# Altium PCB nse5310-module-stm32.PcbDoc
Units mm, origin at the board's own origin, x right, y up, seen from the top; angles counter-clockwise.
Board outline 25 x 25 mm, 2 copper layers (Top Layer, Bottom Layer), stack 1.581 mm thick; 21 components, 18 nets, 106 pads, 0 vias.
Unrouted connection lines stored in the file: 39.
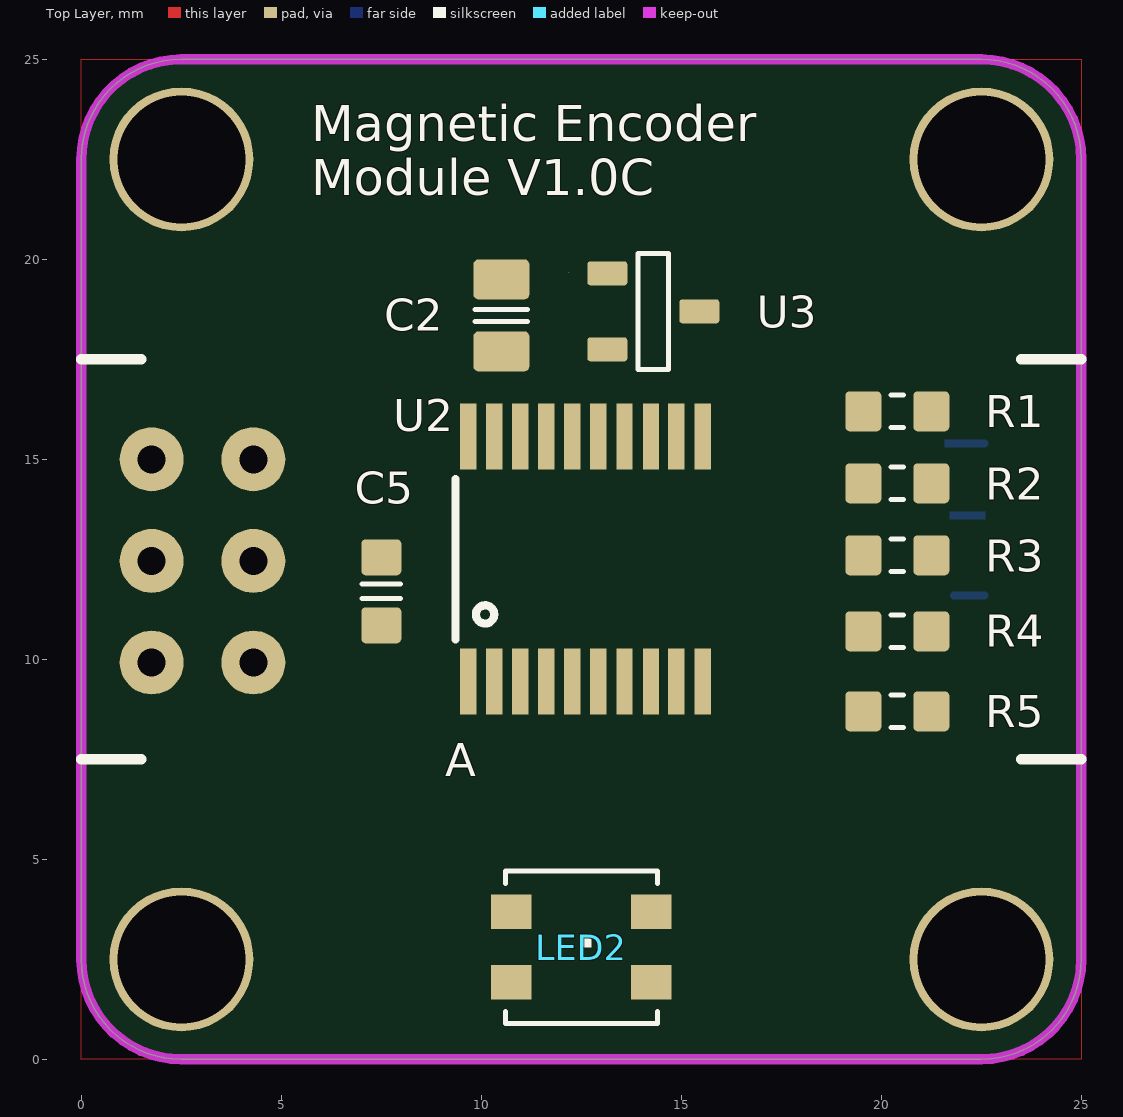
[diagram p0: Top Layer view]
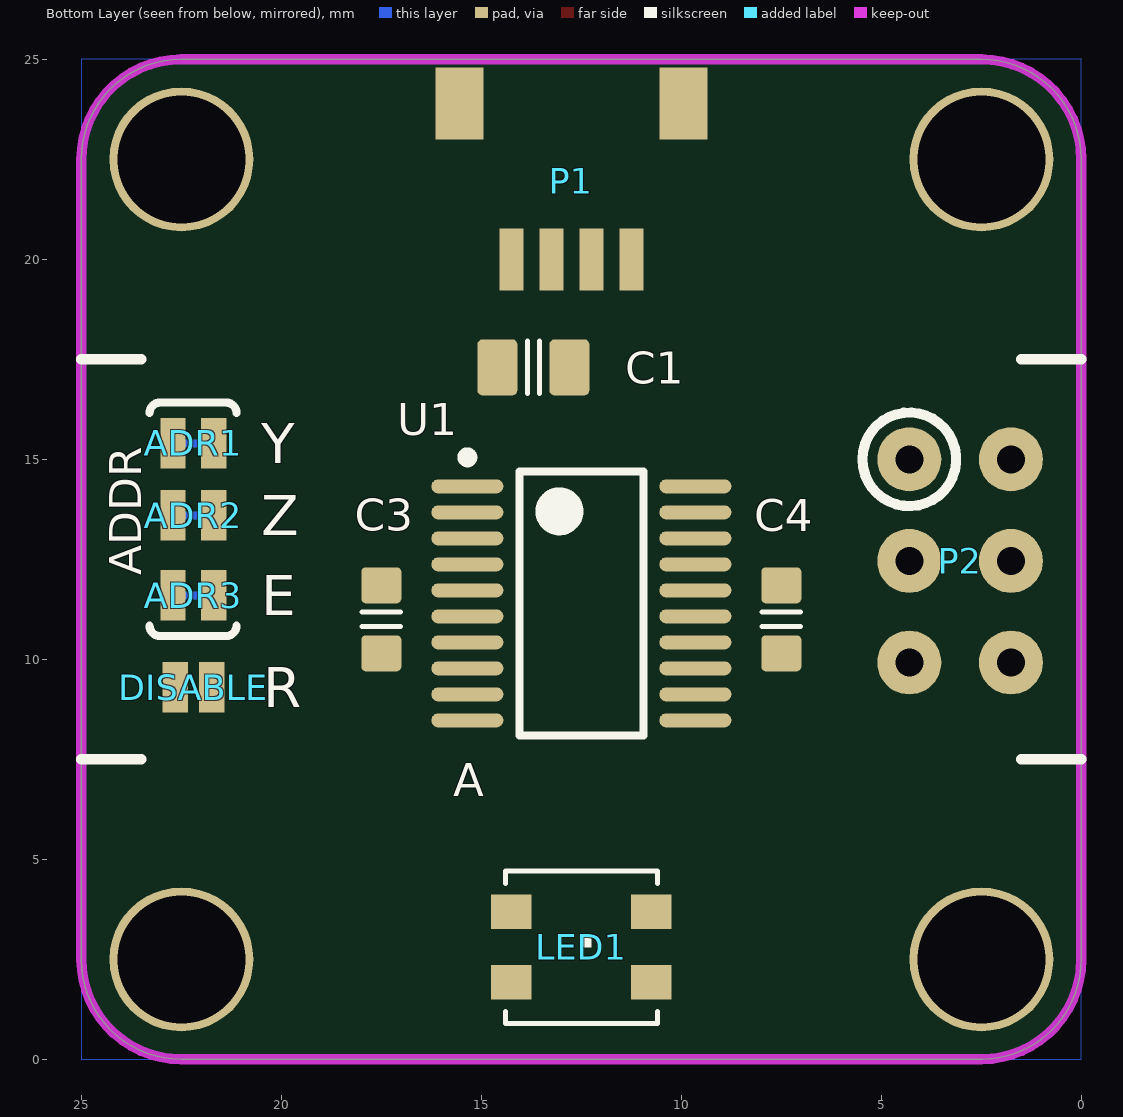
[diagram p1: Bottom Layer view, seen from below]

## Layer stack, top to bottom
Top Solder: solder mask 0.0102, Solder Resist, Dk 3.5
Top Layer: signal copper 0.0356
Dielectric1: dielectric 1.51, FR-4, Dk 4.8
Bottom Layer: signal copper 0.0356
Bottom Solder: solder mask 0.0102, Solder Resist, Dk 3.5

## Board outline
0,2.5 0,22.5 cw(c2.5,22.5) 2.5,25 22.5,25 cw(c22.5,22.5) 25,22.5 25,2.5 cw(c22.5,2.5) 22.5,0 2.5,0 cw(c2.5,2.5)

## Design rules (kind name [scope] priority, off if disabled: settings)
Clearance [All] p1: gap=0.15
FabricationTestPointUsage TestPointUsage [All] p1: valid=0 allowmultiple=FALSE
FabricationTestpoint Testpoint [All] p1: side=3 testpointundercomponent=TRUE minsize=1.016 maxsize=2.54 preferedsize=1.524 minholesize=0 maxholesize=1.016 preferedholesize=0.813 testpointgrid=0.025 allowsidetop=TRUE allowsidebottom=TRUE usegrid=TRUE gridtolerance=0
HoleSize [All] p1: absolutevalues=TRUE maxlimit=3.5 minlimit=0.025 maxpercent=80.000 minpercent=20.000
PolygonConnect [All] p1: connectstyle=Relief reliefconductorwidth=0.254 reliefentries=4 polygonreliefangle="90 Angle" airgapwidth=0.254
RoutingVias [All] p1: holewidth=0.25 width=0.5 viastyle="Through Hole" minholewidth=0.25 minwidth=0.5 maxholewidth=1 maxwidth=1.4
SilkToSolderMaskClearance SilkscreenOverComponentPads [IsPad] p1: minsilkscreentomaskgap=0.254 clearancetoexposedcopper=TRUE
SolderMaskExpansion [All] p1: expansion=0.102
Width [All] p1: maxlimit=1 minlimit=0.2 preferedwidth=0.25
26 further rules are at their usual default settings.

## Components (designator, comment, footprint, x,y, rotation, side; value= is the part's Value field where it differs from the comment)
ADR1 "JUMPER-PAD-2-NC_BY_TRACE" PAD-JUMPER-2-NC_BY_TRACE_YES_SILK#1 22.2,15.4 r0 bottom
ADR2 "JUMPER-PAD-2-NC_BY_TRACE" PAD-JUMPER-2-NC_BY_TRACE_YES_SILK#2 22.2,13.6 r0 bottom
ADR3 "JUMPER-PAD-2-NC_BY_TRACE" PAD-JUMPER-2-NC_BY_TRACE_YES_SILK#1 22.2,11.6 r0 bottom
C1 "approved sub OK" CAPC2012X135N 13.7,17.3 r180 bottom
C2 "approved sub OK" CAPC2012X135N 10.5,18.6 r270 top
C3 "approved sub OK" CAPC1608X90N 17.5,11 r270 bottom
C4 "approved sub OK" CAPC1608X90N 7.5,11 r270 bottom
C5 "approved sub OK" CAPC1608X90N 7.5,11.7 r270 top
DISABLE "JUMPER-PAD-2-NO" PAD-JUMPER-2-NO_NO_SILK 22.2,9.3 r180 bottom
LED1 "WS2812B3535" LED3535 12.5,2.8 r180 bottom
LED2 "WS2812B3535" LED3535 12.5,2.8 r0 top
P1 "JST-SH 4P" SM04B-SRSS-TB 14.25,20 r90 bottom
P2 "ISP" "ICSP Pads - SMD" 4.3,15 r180 bottom
R1 "Thick Film" RESC1608X55N 20.4,16.2 r0 top
R2 "Thick Film" RESC1608X55N 20.4,14.4 r0 top
R3 "Thick Film" RESC1608X55N 20.4,12.6 r180 top
R4 "Thick Film" RESC1608X55N 20.4,10.7 r180 top
R5 "Thick Film" RESC1608X55N 20.4,8.7 r180 top
U1 "STM32F030F4P6" STM-TSSOP20_N 12.5,11.4 r180 bottom
U2 "NSE-5310" NSE-5310 13.25,12.5 r0 top
U3 "AP7313-33SR" SOT23-3 14.3,18.7 r0 top

## Footprints (in the part's own frame and the unit in brackets; to place one, negate y for a bottom-side part, rotate by r counter-clockwise, add the part's x,y. Pads: shape width x height; smd on the part's side, far side on the other; paste and mask are expansions set on the pad)
CAPC1608X90N [mm] "Chip Capacitor, Body 1.6x0.8mm, EIA 0603, IPC Medium Density"
  round 0.254 on Mech15: 0(0,0)
  rrect25% 0.9x1 smd: 1(-0.85,0) 2(0.85,0)
  Top Layer pour cut-out: -0.6,0.5 -0.4,0.7 0.4,0.7 0.6,0.5 0.6,-0.5 0.4,-0.7 -0.4,-0.7 -0.6,-0.5
  silkscreen extent -0.18,-0.48 0.18,0.48, body extent -0.85,-0.45 0.85,0.45, height 0.89
CAPC2012X135N [mm] "Chip Capacitor, Body 2.0x1.2mm, EIA 0805, IPC Medium Density"
  round 0.254 on Mech15: 0(0,0)
  rrect25% 1x1.4 smd: 1(-0.9,0) 2(0.9,0)
  Top Layer pour cut-out: -0.675,0.7 -0.475,0.9 0.475,0.9 0.675,0.7 0.675,-0.7 0.475,-0.9 -0.475,-0.9 -0.675,-0.7
  silkscreen extent -0.15,-0.65 0.15,0.65, body extent -1.1,-0.72 1.1,0.73, height 1.34
"ICSP Pads - SMD" [mm]
  round 1.6 hole 0.7: 0(0,0) 1(2.54,0) 2(0,-2.54) 3(2.54,-2.54) 4(0,-5.08) 5(2.54,-5.08)
  silkscreen extent -1.17,-1.17 1.17,1.17
LED3535 [mil]
  rect 40x34 smd: 1(-68.9,35) 2(-68.9,-34.45) 3(69,-34.45) 4(69,35)
  silkscreen extent -75,-75 75,75
NSE-5310 [mil]
  rect 16x65 smd: 1(-140.75,-120.08) 2(-115.16,-120.08) 3(-89.57,-120.08) 4(-63.98,-120.08) 5(-38.39,-120.08) 6(-12.8,-120.08) 7(13,-120.08) 8(39,-120.08) 9(64,-120.08) 10(90,-120.08) 11(90,121) 12(64,121) 13(39,121) 14(13,121) 15(-12.8,121) 16(-38.39,121) 17(-63.98,121) 18(-89.57,121) 19(-115.16,121) 20(-140.75,121)
  silkscreen extent -154,-79 -115,79
PAD-JUMPER-2-NC_BY_TRACE_YES_SILK#1 [mil]
  rect 25x50 smd: 1(-20,0) 2(20,0)
  Top Layer lines w8: -15,0 15,0
  silkscreen extent -42,-40 43,-30
PAD-JUMPER-2-NC_BY_TRACE_YES_SILK#2 [mil]
  rect 25x50 smd: 1(-20,0) 2(20,0)
PAD-JUMPER-2-NO_NO_SILK [mm]
  rect 0.635x1.27 smd: 1(-0.45,0) 2(0.457,0)
RESC1608X55N [mm] "Chip Resistor, Body 1.6x0.8mm, EIA 0603, IPC Medium Density"
  round 0.254 on Mech15: 0(0,0)
  rrect25% 0.9x1 smd: 1(-0.85,0) 2(0.85,0)
  Top Layer pour cut-out: -0.6,0.5 -0.4,0.7 0.4,0.7 0.6,0.5 0.6,-0.5 0.4,-0.7 -0.4,-0.7 -0.6,-0.5
  silkscreen extent -0.15,-0.41 0.15,0.41, body extent -0.87,-0.47 0.88,0.48, height 0.54
SM04B-SRSS-TB [mm]
  rect 1.55x0.6 smd: 0(0,0) 1(0,-1) 2(0,-2) 3(0,-3)
  rect 1.8x1.2 smd: ""(3.9,-4.3) ""(3.9,1.3)
  body extent -0.55,-4.5 4.4,1.5, height 2.96
SOT23-3 [mm] "SOT23, 3 pin"
  round 0.5 on Mech15: 0(0,0)
  rrect25% 1x0.6 smd: 1(-1.15,0.95) 2(-1.15,-0.95) 3(1.15,0)
  silkscreen extent -0.38,-1.45 0.38,1.45, body extent -1.4,-1.45 1.4,1.45, height 1.29
STM-TSSOP20_N [mm] "SOP, 20-Leads, Body 6.6x4.5mm, Pitch 0.65mm, IPC Medium Density"
  oval 1.8x0.35 smd: 1(-2.85,2.925) 2(-2.85,2.275) 3(-2.85,1.625) 4(-2.85,0.975) 5(-2.85,0.325) 6(-2.85,-0.325) 7(-2.85,-0.975) 8(-2.85,-1.625) 9(-2.85,-2.275) 10(-2.85,-2.925) 11(2.85,-2.925) 12(2.85,-2.275) 13(2.85,-1.625) 14(2.85,-0.975) 15(2.85,-0.325) 16(2.85,0.325) 17(2.85,0.975) 18(2.85,1.625) 19(2.85,2.275) 20(2.85,2.925)
  silkscreen extent -2.98,-3.3 1.55,3.77, body extent -2.25,-3.3 2.25,3.3, height 1.2

## Part data
C1 C2: library part CAPC_10u_0805_10V, "Capacitor SMD Cer 10uF 10% 10V X5R 0805"
C3 C4 C5: library part CAPC_100n_0603_X7R_50V_10%, "Capacitor SMD Cer 100nF 10% 50V X7R 0603"
P1: library part SM04B-SRSS-TB
P2: library part "ISP Header"
R1 R2: library part RES_10K_0603_5%, "Resistor SMD chip 10k Ohm 0.1W 5% 0603"
R3 R4 R5: library part RES_3K3_0603_5%, "Resistor SMD chip 3.3k Ohm 0.1W 5% 0603"
U1: "ARM Cortex-M0 32-bit MCU, 16 KB Flash, 4 KB Internal RAM, 15 I/Os, 20-pin TSSOP, -40 to 85 degC, Tube"
U3: library part VREG_3V3_AP7313-33SR, "Voltage Regulator 3.3V LDO SOT23R-3 SMD"

## Free pads (board coordinates)
  round 3.6 hole 3.2: 0(2.5,2.5) 0(2.5,22.5) 0(22.5,2.5) 0(22.5,22.5)

## Nets (pads, with @x,y where several pads share a name; then routed paths per layer and width w, separated by ;. In a path a pad name is that pad's centre, name@x,y a point inside that pad or via, vN(x,y) a via of type N, cw(c..) or ccw(c..) an arc to the next point about the centre after c; other vN are vias at no path point)
3V3: C2.1 C3.1 C4.1 C5.1 P2.0 R2.2 R3.1 R4.1 R5.1 U1.5 U1.16 U2.18 U2.19 U3.2
ADR1: ADR1.2 U1.6
ADR2: ADR2.2 U1.7
ADR3: ADR3.2 U1.8
BOOT0: P2.5 R1.1 U1.1
DISABLE: DISABLE.1 U1.9
ENC_SCL: R3.2 U1.10 U2.13
ENC_SDA: R4.2 U1.11 U2.12
ENC_SEL: U1.12 U2.14
GND: ADR1.1 ADR2.1 ADR3.1 C1.2 C2.2 C3.2 C4.2 C5.2 DISABLE.2 LED1.4 LED2.4 P1.1 P2.4 R1.2 U1.15 U2.8 U3.1
HOST_SCL: P1.3 U1.17
HOST_SDA: P1.2 U1.18
NetLED1_3: LED1.3 LED2.1
NRST: P2.3 R2.1 U1.4
SWCLK: P2.2 U1.20
SWDIO: P2.1 U1.19
VCC: C1.1 LED1.2 LED2.2 P1.0 U3.3
WS2812B: LED1.1 R5.2 U1.13
pads on no net: C1.0 C2.0 C3.0 C4.0 C5.0 LED2.3 P1. R1.0 R2.0 R3.0 R4.0 R5.0 U1.2 U1.3 U1.14 U2.1 U2.2 U2.3 U2.4 U2.5 U2.6 U2.7 U2.9 U2.10 U2.11 U2.15 U2.16 U2.17 U2.20 U3.0

## Polygon pours and split planes (outlines as drawn)
GND on Bottom Layer "Bottom Layer-GND" (solid, shelved, pour order 0): 25,25 25,0 0,0 0,25
GND on Top Layer "Top VCC" (solid, shelved, pour order 2): 25,25 25,0 0,0 0,25

## Keep-outs
Keep-Out Layer:
  the board outline again, w0.254

## Other copper
Bottom Layer:
  rectangle: 21.7,13.5 22.608,13.7
  rectangle net GND: 21.584,15.3 22.492,15.5

## Silkscreen, mask and mechanical layers (free items; w line width, h text height)
Top Overlay:
  lines w0.254: 0,7.5 1.5,7.5 ; 0,17.5 1.5,17.5 ; 23.5,7.5 25,7.5 ; 23.5,17.5 25,17.5
  text "Magnetic Encoder / Module V1.0C" at 5.75,21.6 h0.9
  text "A" at 9.1,6.8 h1.4
Bottom Overlay:
  lines w0.254: 0,7.5 1.5,7.5 ; 0,17.5 1.5,17.5 ; 23.5,7.5 25,7.5 ; 23.5,17.5 25,17.5
  text "Y" at 20.508,14.9 h1
  text "Z" at 20.508,13.1 h1
  text "ADDR" at 23.5,12.1 h0.8 r270
  text "E" at 20.508,11.1 h1
  text "R" at 20.45,8.8 h1
  text "A" at 15.7,6.3 h1.4
Bottom Solder:
  rectangle: 21.908,15.2 22.408,15.6
  rectangle: 21.908,13.4 22.408,13.8
  rectangle: 21.908,11.4 22.408,11.8
Mechanical 4:
  lines w0.254: 0,12.5 25,12.5
Mechanical 16:
  drawing of 1878 lines, arcs and shapes, not listed
  text "1" at -84.785,94.869 h1.78
  text "2" at -12.141,94.869 h1.78
  text "3" at 61.011,94.869 h1.78
  text "4" at 133.909,94.869 h1.78
  text "A" at -119.126,71.857 h1.78
  text "A" at 167.894,71.857 h1.78
  text "B" at -119.126,23.8 h1.78
  text "B" at 167.894,23.8 h1.78
  text "C" at -119.126,-24.714 h1.78
  text "C" at 167.894,-24.714 h1.78
  text "ENGINEER:" at 52.959,-61.722 h1.14
  text "TITLE:" at 91.059,-61.722 h1.14
  text "PCB DESIGNER:" at 52.959,-69.215 h1.14
  text "D" at -119.126,-72.72 h1.78
  text "D" at 167.894,-72.72 h1.78
  text "DATE:" at 52.959,-76.962 h1.14
  text "PART NO.:" at 91.059,-76.962 h1.14
  text "REV:" at 144.399,-76.962 h1.14
  text "Altium Limited" at 19.939,-79.502 h1.78
  text ".PRINT_DATE" at 54.229,-80.01 h1.78
  text "12a Rodborough Rd" at 19.939,-82.042 h1.78
  text "Frenchs Forest" at 19.939,-84.582 h1.78
  text "FILE NAME:" at 52.959,-84.582 h1.14
  text "DWG NO:" at 91.059,-84.582 h1.14
  text "SCALE:" at 144.399,-84.582 h1.14
  text "NSW 2086" at 19.939,-87.122 h1.78
  text ".PCB_FILE_NAME_NO_PATH" at 54.229,-87.63 h1.78
  text "1" at -84.785,-93.091 h1.78
  text "2" at -12.141,-93.091 h1.78
  text "3" at 61.011,-93.091 h1.78
  text "4" at 133.909,-93.091 h1.78

## Dimensions
2.5,22.5 to 22.5,22.5 on Mechanical 13
0,22.5 to 25,22.5 on Mechanical 13
2.5,25 to 2.5,0 on Mechanical 13